# Altium PCB gateway2.PcbDoc
Units mil, origin at the board's own origin, x right, y up, seen from the top; angles counter-clockwise.
Board outline 6000 x 4000 mil, 2 copper layers (Top Layer, Bottom Layer); 21 components, 59 nets, 200 pads, 22 vias.
Unrouted connection lines stored in the file: 8.
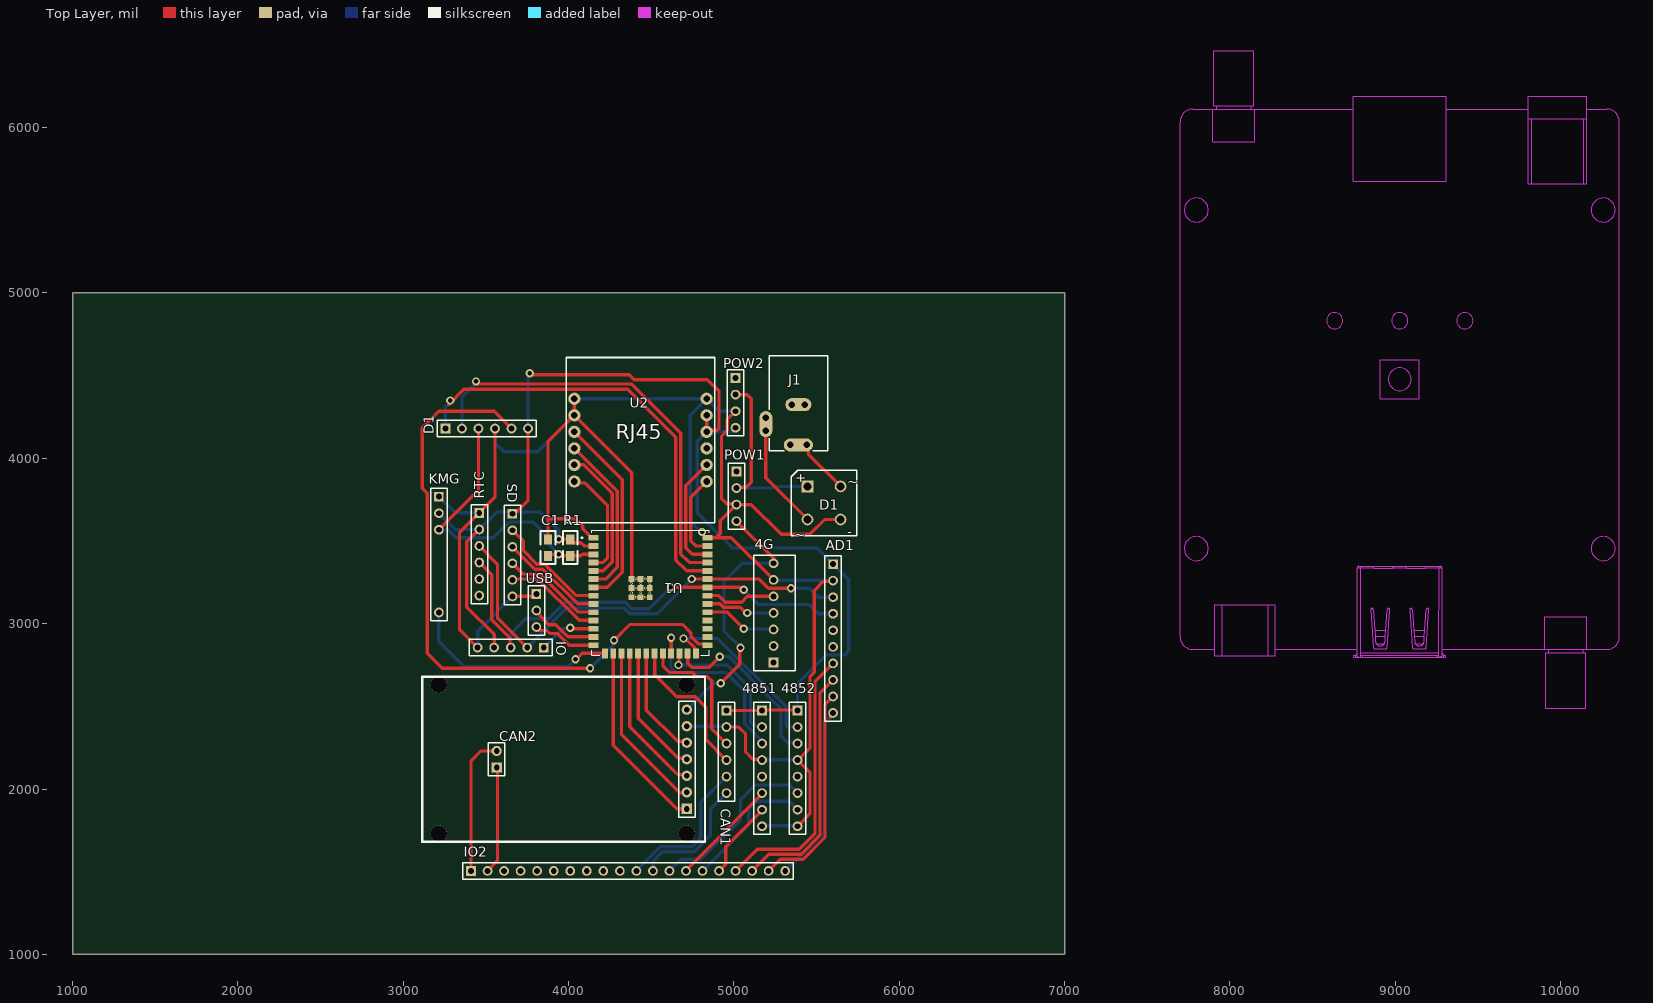
[diagram p0: Top Layer view]
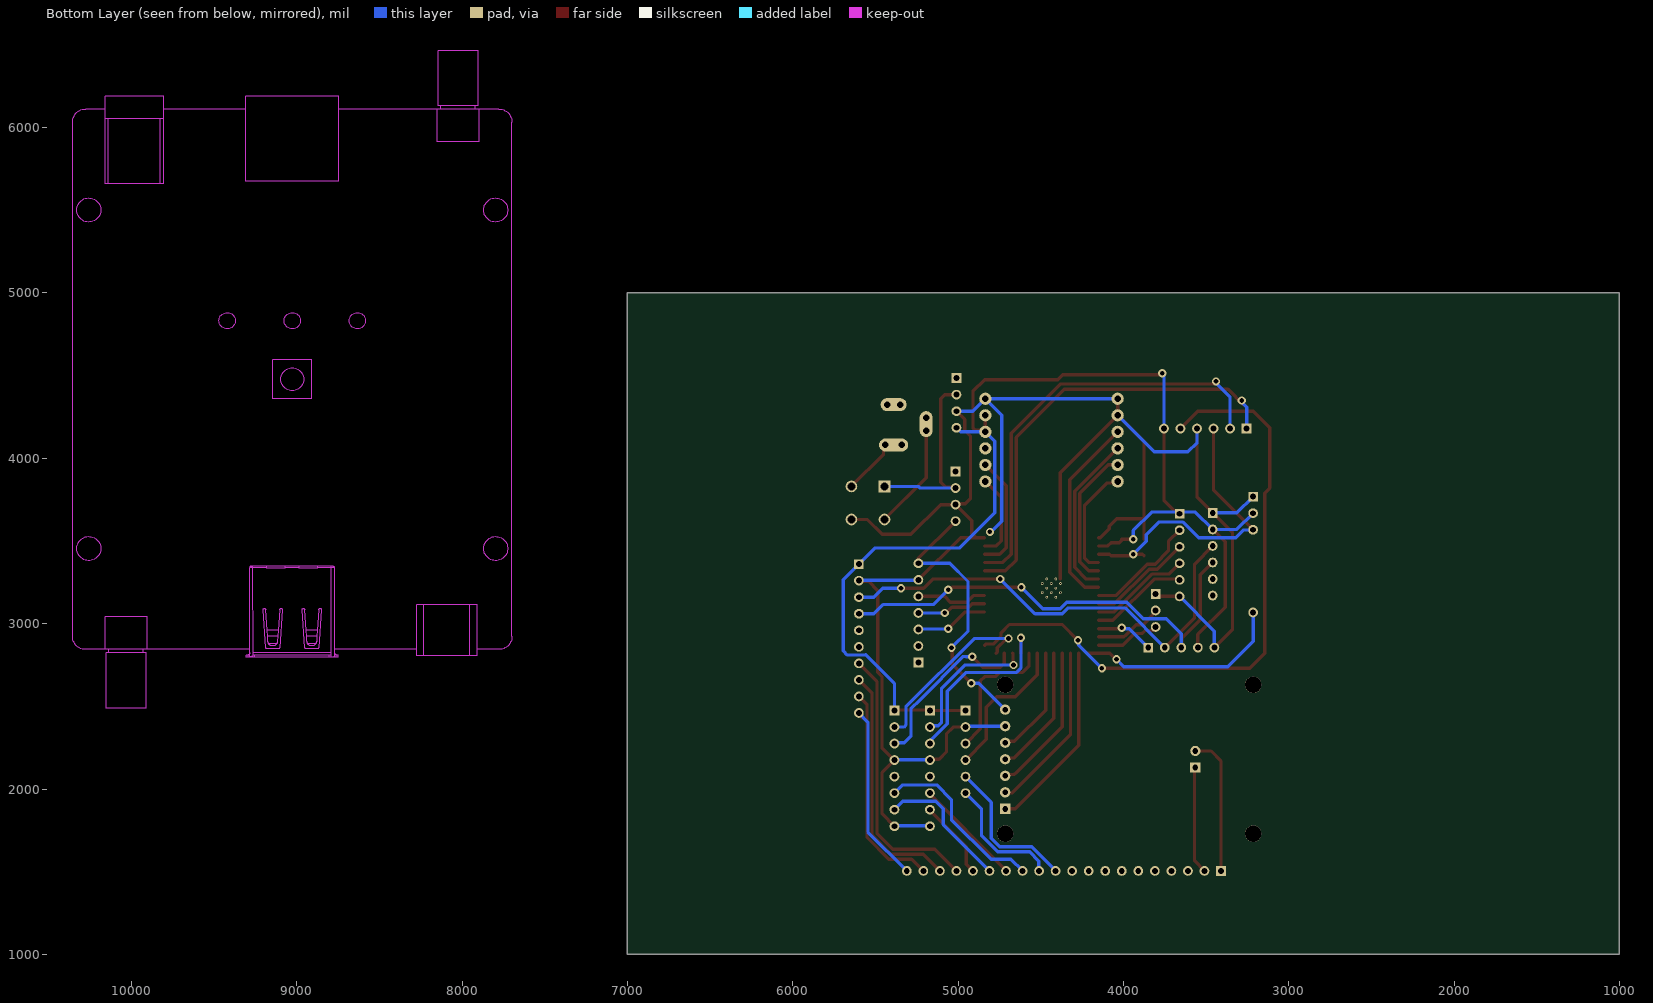
[diagram p1: Bottom Layer view, seen from below]

## Layer stack, top to bottom
Top Solder: solder mask 0.4, Solder Resist, Dk 3.5
Top Layer: signal copper 1.4
Dielectric 1: dielectric 12.6, FR-4, Dk 4.8
Bottom Layer: signal copper 1.4
Bottom Solder: solder mask 0.4, Solder Resist, Dk 3.5

## Board outline
1000,1000 7000,1000 7000,5000 1000,5000

## Design rules (kind name [scope] priority, off if disabled: settings)
Clearance [All] p1: gap=10 ignorepadtopadclearanceinfootprint=FALSE except(0: Arc-Hole Track-Hole SMDPad-Hole THPad-Hole Via-Hole Fill-Hole Poly-Hole Region-Hole Text-Hole)
PolygonConnect [All] p1: connectstyle=Relief reliefconductorwidth=10 reliefentries=4 polygonreliefangle="90 Angle" airgapwidth=10
RoutingVias [All] p1: holewidth=28 width=50 viastyle="Through Hole" minholewidth=28 minwidth=50 maxholewidth=28 maxwidth=50
SolderMaskExpansion [All] p1: expansion=4 istentingtop=FALSE
Width [All] p1: maxlimit=20 minlimit=20 preferedwidth=20
30 further rules are at their usual default settings.

## Components (designator, comment, footprint, x,y, rotation, side; value= is the part's Value field where it differs from the comment)
4G "DS1307模块" DS1307 5240,2765 r90 top
4851 "Header 8" HDR1X8 5170,2475 r270 top
4852 "Header 8" HDR1X8 5385,2475 r270 top
AD1 "Header 10" HDR1X10 5600,3360 r270 top
C1 "100pf" 0805 3875,3510 r90 top value=100pF
CAN1 "2.54DIP6" HDR1X6 4955,2475 r270 top
CAN2 "Can-BUs Module" CAN模块 3955,2260 r270 top
D1 "2.54DIP6" HDR1X6 3255,4180 r0 top
D1 "整流全桥-插" D-38 5545,3730 r0 top
IO "Header 5" HDR1X5 3850,2855 r180 top
IO2 "Header 20" HDR1X20 3410,1505 r0 top
J1 "PWR2.5" KLD-0202 5390,4620 r270 top
KMG "Header 8" KMG 3215,3410 r270 top
POW1 "Header 4" HDR1X4 5015,3920 r270 top
POW2 "Header 4" HDR1X4 5010,4485 r270 top
R1 "10K" 0805 4010,3510 r90 top
RTC "2.54DIP6" HDR1X6 3460,3670 r270 top
SD "Header 6" HDR1X6 3660,3665 r270 top
U1 "ESP32-S3-WROOM-1U" ESP32-S3-WROOM-1U 4435,3213.11 r0 top
U2 "W5500" W5500 2755,3995 r0 top
USB "Header 3" HDR1X3 3805,3180 r270 top

## Footprints (in the part's own frame and the unit in brackets; to place one, negate y for a bottom-side part, rotate by r counter-clockwise, add the part's x,y. Pads: shape width x height; smd on the part's side, far side on the other; paste and mask are expansions set on the pad)
0805 [mil]
  rect 60x50 smd: 1(0,0) 2(-100,0)
  silkscreen extent -150,-45 50,45
CAN模块 [mil]
  rect 62x62 hole 35 paste+0 mask+4: 1(380,760) 8(130,-390)
  round 62 hole 35 paste+0 mask+4: 2(280,760) 3(180,760) 4(80,760) 5(-20,760) 6(-120,760) 7(-220,760) 9(30,-390)
  round 100 hole 100 unplated paste+0: ""(-370,760) ""(-370,-740) ""(530,760) ""(530,-740)
  silkscreen extent -420,-840 580,870
D-38 [mm] "Bridge Rectifier; 4 Terminals; Body 9.4 x 9.4 mm (typ); Pitch 5.08 mm"
  rect 1.8x1.8 hole 1.2: 1(-2.54,2.54)
  round 1.8 hole 1.2: 2(-2.54,-2.54) 3(2.54,-2.54) 4(2.54,2.54)
  silkscreen extent -5,-5 5,5, body extent -5,-5 5,5, height 9.91
DS1307 [mm] "Connector; Header; 7 Position"
  rect 1.5x1.5 hole 0.9: 1(0,0)
  round 1.5 hole 0.9: 2(2.54,0) 3(5.08,0) 4(7.62,0) 5(10.16,0) 6(12.7,0) 7(15.24,0)
  silkscreen extent -1.27,-3.3 16.51,3.05
ESP32-S3-WROOM-1U [mm]
  rect 1.5x0.9 smd: 1(-7.226,7.775) 2(-7.226,6.505) 3(-7.226,5.235) 4(-7.226,3.965) 5(-7.226,2.695) 6(-7.226,1.425) 7(-7.226,0.155) 8(-7.226,-1.115) 9(-7.226,-2.385) 10(-7.226,-3.655) 11(-7.226,-4.925) 12(-7.226,-6.195) 13(-7.226,-7.465) 14(-7.226,-8.735) 27(10.274,-8.735) 28(10.274,-7.465) 29(10.274,-6.195) 30(10.274,-4.925) 31(10.274,-3.655) 32(10.274,-2.385) 33(10.274,-1.115) 34(10.274,0.155) 35(10.274,1.425) 36(10.274,2.695) 37(10.274,3.965) 38(10.274,5.235) 39(10.274,6.505) 40(10.274,7.775)
  rect 0.9x1.5 smd: 15(-5.461,-9.985) 16(-4.191,-9.985) 17(-2.921,-9.985) 18(-1.651,-9.985) 19(-0.381,-9.985) 20(0.889,-9.985) 21(2.159,-9.985) 22(3.429,-9.985) 23(4.699,-9.985) 24(5.969,-9.985) 25(7.239,-9.985) 26(8.509,-9.985)
  rect 0.9x0.9 smd: 41_1(-1.376,1.455) 41_2(0.024,1.455) 41_3(1.424,1.455) 41_4(-1.376,0.055) 41_5(0.024,0.055) 41_6(1.424,0.055) 41_7(-1.376,-1.345) 41_8(0.024,-1.345) 41_9(1.424,-1.345)
  round 0.4 hole 0.2 mask+0: 41_10(-0.676,1.455) 41_11(0.724,1.455) 41_12(-1.376,0.755) 41_13(0.024,0.755) 41_14(1.424,0.755) 41_15(-0.676,0.055) 41_16(0.724,0.055) 41_17(-1.376,-0.645) 41_18(0.024,-0.645) 41_19(1.424,-0.645) 41_20(-0.676,-1.345) 41_21(0.724,-1.345)
  silkscreen extent -9.08,-10.24 10.52,8.96
HDR1X3 [mm] "Connector; Header; 3 Position"
  rect 1.5x1.5 hole 0.9: 1(0,0)
  round 1.5 hole 0.9: 2(2.54,0) 3(5.08,0)
  silkscreen extent -1.27,-1.27 6.35,1.27
HDR1X4 [mm] "Connector; Header; 4 Position"
  rect 1.5x1.5 hole 0.9: 1(0,0)
  round 1.5 hole 0.9: 2(2.54,0) 3(5.08,0) 4(7.62,0)
  silkscreen extent -1.27,-1.27 8.89,1.27
HDR1X5 [mm] "Connector; Header; 5 Position"
  rect 1.5x1.5 hole 0.9: 1(0,0)
  round 1.5 hole 0.9: 2(2.54,0) 3(5.08,0) 4(7.62,0) 5(10.16,0)
  silkscreen extent -1.27,-1.27 11.43,1.27
HDR1X6 [mm] "Connector; Header; 6 Position"
  rect 1.5x1.5 hole 0.9: 1(0,0)
  round 1.5 hole 0.9: 2(2.54,0) 3(5.08,0) 4(7.62,0) 5(10.16,0) 6(12.7,0)
  silkscreen extent -1.27,-1.27 13.97,1.27
HDR1X8 [mm] "Connector; Header; 8 Position"
  rect 1.5x1.5 hole 0.9: 1(0,0)
  round 1.5 hole 0.9: 2(2.54,0) 3(5.08,0) 4(7.62,0) 5(10.16,0) 6(12.7,0) 7(15.24,0) 8(17.78,0)
  silkscreen extent -1.27,-1.27 19.05,1.27
HDR1X10 [mm] "Connector; Header; 10 Position"
  rect 1.5x1.5 hole 0.9: 1(0,0)
  round 1.5 hole 0.9: 2(2.54,0) 3(5.08,0) 4(7.62,0) 5(10.16,0) 6(12.7,0) 7(15.24,0) 8(17.78,0) 9(20.32,0) 10(22.86,0)
  silkscreen extent -1.27,-1.27 24.13,1.27
HDR1X20 [mm] "Connector; Header; 20 Position"
  rect 1.5x1.5 hole 0.9: 1(0,0)
  round 1.5 hole 0.9: 2(2.54,0) 3(5.08,0) 4(7.62,0) 5(10.16,0) 6(12.7,0) 7(15.24,0) 8(17.78,0) 9(20.32,0) 10(22.86,0) 11(25.4,0) 12(27.94,0) 13(30.48,0) 14(33.02,0) 15(35.56,0) 16(38.1,0) 17(40.64,0) 18(43.18,0) 19(45.72,0) 20(48.26,0)
  silkscreen extent -1.27,-1.27 49.53,1.27
KLD-0202 [mm] "DC Power Jack, 2.5mm, KLD Series, PCB Mount"
  oval 2x4.5 all layers, no hole: 1(13.7,0)
  round 1.5 hole 1: 1A(13.7,-1.25) 1B(13.7,1.25) 2A(7.5,-1) 2B(7.5,1) 3A(9.5,-5) 3B(11.5,-5)
  oval 2x4 all layers, no hole: 2(7.5,0)
  oval 4x2 all layers, no hole: 3(10.5,-5)
  silkscreen extent 0,-4.5 14.6,4.5
KMG [mm]
  rect 1.5x1.5 hole 0.9: 1(-9.094,0.011)
  round 1.5 hole 0.9: 2(-6.554,0.011) 3(-4.014,0.011) 8(8.686,0.011)
  silkscreen extent -10.36,-1.26 9.96,1.28
W5500 [mil]
  round 74 hole 40 paste+0 mask+2: 1(1280,365) 2(1280,265) 3(1280,165) 4(1280,65) 5(1280,-35) 6(1280,-135) 7(2080,-135) 8(2080,-35) 9(2080,65) 10(2080,165) 11(2080,265) 12(2080,365)
  silkscreen extent 1230,-385 2130,615

## Part data
4G: library part "Header 7", "Header, 7-Pin", LatestRevisionDate=17-Jul-2002, LatestRevisionNote="Re-released for DXP Platform.", Publisher="Altium Limited"
4851 4852 KMG: "Header, 8-Pin", LatestRevisionDate=17-Jul-2002, LatestRevisionNote="Re-released for DXP Platform.", Publisher="Altium Limited"
AD1: "Header, 10-Pin", LatestRevisionDate=17-Jul-2002, LatestRevisionNote="Re-released for DXP Platform.", Publisher="Altium Limited"
C1: library part "Cap Semi", "Capacitor (Semiconductor SIM Model)", LatestRevisionDate=29-May-2009, LatestRevisionNote="IPC-7351 Footprint Added.", PackageDescription="Chip Capacitor", PackageReference=C1206, Published=8-Jun-2000, Publisher="Altium Limited"
CAN1 D1 RTC: library part "Header 6", "Header, 6-Pin", LatestRevisionDate=17-Jul-2002, LatestRevisionNote="Re-released for DXP Platform.", Publisher="Altium Limited"
D1: library part Bridge1, "Full Wave Diode Bridge", DatasheetVersion=E2732B, LatestRevisionDate=29-May-2009, LatestRevisionNote="Sch pins A & K swapped.", PackageDescription="Bridge Rectifier; 4 Terminals; Body 9.4 x 9.4 mm (typ); Pitch 5.08 mm", PackageReference=D-38, Published=8-Jun-2000, Publisher="Altium Limited"
IO: "Header, 5-Pin", LatestRevisionDate=17-Jul-2002, LatestRevisionNote="Re-released for DXP Platform.", Publisher="Altium Limited"
IO2: "Header, 20-Pin", LatestRevisionDate=17-Jul-2002, LatestRevisionNote="Re-released for DXP Platform.", Publisher="Altium Limited"
J1: "Low Voltage Power Supply Connector", ComponentLink1Description="Manufacturer Link", ComponentLink1URL=http://domino.kycon.com/internet/Products.html, DatasheetDocument=09-May-2002, Published=17-Dec-2003, Publisher="Altium Limited"
POW1 POW2: "Header, 4-Pin", LatestRevisionDate=17-Jul-2002, LatestRevisionNote="Re-released for DXP Platform.", Publisher="Altium Limited"
R1: library part Res3, "Resistor", LatestRevisionDate=29-May-2009, LatestRevisionNote="IPC-7351 Footprint Added.", PackageDescription="Chip Resistor", PackageReference=J1-0603, Published=8-Jun-2000, Publisher="Altium Limited"
SD: "Header, 6-Pin", LatestRevisionDate=17-Jul-2002, LatestRevisionNote="Re-released for DXP Platform.", Publisher="Altium Limited"
U1: "2.4 GHz Wi-Fi (802.11 b/g/n) and Bluetooth 5 (LE) module", Package=Package, Availability="Not in stock", Check_prices=https://www.snapeda.com/parts/ESP32-S3-WROOM-1U/Espressif+Systems/view-part/?ref=eda, MF="Espressif Systems", MP=ESP32-S3-WROOM-1U, Price=None, SnapEDA_Link=https://www.snapeda.com/parts/ESP32-S3-WROOM-1U/Espressif+Systems/view-part/?ref=snap
USB: "Header, 3-Pin", LatestRevisionDate=17-Jul-2002, LatestRevisionNote="Re-released for DXP Platform.", Publisher="Altium Limited"
CAN2: Contributor=RPRCircuits, spicePre=U, spiceSymbolName="Can-BUs Module"

## Via types
v1: diameter 50, hole 28, Top Layer to Bottom Layer, 22 vias

## Nets (pads, with @x,y where several pads share a name; then routed paths per layer and width w, separated by ;. In a path a pad name is that pad's centre, name@x,y a point inside that pad or via, vN(x,y) a via of type N, cw(c..) or ccw(c..) an arc to the next point about the centre after c; other vN are vias at no path point)
4GRST: 4G.3 U1.31 | length 443.5
  Top Layer w20: U1.31@4840,3070 4960,3070 v1(5060,2970)
  Bottom Layer w20: v1(5060,2970) 5062.5,2967.5 5237.5,2967.5 4G.3
4GRXD: 4G.4 U1.32 | length 422.8
  Top Layer w20: U1.32@4840,3120 4914.57,3120 4934.57,3100 5037.22,3100 5072.22,3065 v1(5080,3065)
  Bottom Layer w20: v1(5080,3065) 4G.4
4GTXD: 4G.5 U1.33 | length 431.1
  Top Layer w20: U1.33@4840,3170 4907,3170 4947,3130 5047,3130 5082,3165 4G.5
12V+: D1.4@5645,3830 J1.1 J1.1A J1.1B | length 474.2
  Top Layer w20: J1.1 5423.32,4080.63 5450.45,4053.5 5450.45,4024.55 D1.4@5645,3830
  Bottom Layer w20: J1.1A J1.1 J1.1B
12V-: D1.2@5445,3630 J1.3 J1.3A J1.3B | length 641.6
  Top Layer w20: J1.3B 5193.15,3881.85 D1.2@5445,3630
A0: AD1.7 IO2.17 | length 1648.1
  Top Layer w20: IO2.17 5141.21,1636.21 5395,1636.21 5490.47,1731.69 5490.47,2650.47 AD1.7
A1: AD1.8 IO2.18 | length 1472.9
  Top Layer w20: IO2.18 5211.21,1606.21 5407.43,1606.21 5520.47,1719.26 5520.47,2580.47 AD1.8
A2: AD1.9 IO2.19 | length 1297.8
  Top Layer w20: IO2.19 5281.21,1576.21 5419.85,1576.21 5550.47,1706.83 5550.47,2510.47 AD1.9
A3: AD1.10 IO2.20 | length 1113.3
  Top Layer w20: 5580.47,2429.9 5600,2449.43 AD1.10
  Bottom Layer w20: IO2.20 5545,1740 5545,2405 AD1.10
ADDR: AD1.5
ALART: AD1.6
CAN0-CS: CAN2.5 U1.20 | length 669.9
  Top Layer w20: U1.20@4470.51,2820.79 4470.51,2476.91 4659.39,2288.04 4706.96,2288.04 CAN2.5
CAN0-INT: CAN2.1 U1.16 | length 1160
  Top Layer w20: U1.16@4270.51,2820.79 4270.51,2264.49 4655,1880 CAN2.1
CAN0_MISO: CAN2.4 U1.19 | length 790.6
  Top Layer w20: U1.19@4420.51,2820.79 4420.51,2426.91 4659.39,2188.04 4706.96,2188.04 CAN2.4
CAN0_MOSI: CAN2.3 U1.18 | length 911.3
  Top Layer w20: U1.18@4370.51,2820.79 4370.51,2376.91 4648.74,2098.68 4659.39,2088.04 4706.96,2088.04 CAN2.3
CAN0_SCK: CAN2.2 U1.17 | length 1035.2
  Top Layer w20: U1.17@4320.51,2820.79 4320.51,2326.91 4671.21,1976.21 4711.21,1976.21 CAN2.2
CANH1: CAN1.5 IO2.11 | length 908.6
  Bottom Layer w20: IO2.11 4555,1650 4747.57,1650 4798.79,1701.21 4798.79,1918.79 CAN1.5
CANH2: CAN2.9 IO2.1 | length 851.9
  Top Layer w20: IO2.1 3410,2170 3470,2230 CAN2.9 CAN2.9@3570,2235
CANL1: CAN1.6 IO2.12 | length 767.1
  Bottom Layer w20: IO2.12 4511.95,1506.95 4511.95,1564.53 4567.43,1620 4760,1620 4858,1718 4858,1878 CAN1.6
CANL2: CAN2.8 IO2.2 | length 654.9
  Top Layer w20: IO2.2 3570,1565 CAN2.8@3570,2135
CLK: RTC.6
CRX1: CAN1.4 U1.21 | length 892.5
  Top Layer w20: U1.21@4520.51,2820.79 4520.51,2690.49 4653,2558 4767,2558 4830,2495 4830,2300 CAN1.4
CTX1: CAN1.3 U1.22 | length 825.1
  Top Layer w20: U1.22@4570.51,2820.79 4570.51,2744.49 4610,2705 4748.99,2705 4773.99,2680 4840,2680 4865,2655 4865,2365 CAN1.3
DTR: 4G.1
EN: C1.2 D1.3@3455,4180 KMG.3 R1.2 U1.3 | length 1873.5
  Top Layer w20: KMG.3 3455,3807.61 D1.3@3455,4180 ; C1.2 3885,3420 v1(3940,3420) ; v1@3950,3410 4075,3410 4085,3420 U1.3@4151.02,3420
  Bottom Layer w20: KMG.3 3217.38,3566.08 3274.95,3566.08 3321.51,3519.53 3544.49,3519.53 3639.49,3614.53 3785.47,3614.53 3862.48,3537.52 3862.48,3497.52 v1(3940,3420)
FeedWatchdogPin: KMG.8 U1.15 | length 1277.2
  Top Layer w20: v1(4041.92,2784.64) 4047.4,2784.64 4083.55,2820.79 U1.15@4220.51,2820.79
  Bottom Layer w20: KMG.8 3215.42,2892.58 3368,2740 3997.28,2740 v1(4041.92,2784.64)
GND: 4G.6 4851.4 4851.8 4852.4 4852.8 AD1.2 C1.1 CAN1.2 CAN2.6 D1.3@5645,3630 D1.4@3555,4180 IO.5 KMG.1 POW1.3 POW2.3 RTC.1 SD.6 U1.1 U1.40 U1.41_1 U1.41_2 U1.41_3 U1.41_4 U1.41_5 U1.41_6 U1.41_7 U1.41_8 U1.41_9 U2.1 U2.2 U2.12 USB.1 | length 12473
  Top Layer w20: IO.5 3340,2965 3340,3550 RTC.1 3555,3765 D1.4@3555,4180 ; SD.6 USB.1@3810,3165 ; C1.1 3875,3635 ; U2.1 U2.2 ; U1.1@4151.02,3520 4139.21,3520 4085,3574.21 4085,3590 4040,3635 3875,3635 ; U1.41_1@4381.34,3271.18 4381.34,3913.66 U2.2 ; U1.40@4840,3520 4890,3520 ; CAN1.2 5030,2375 5070,2335 5070,2225 5115,2180 4851.4@5180,2180 ; POW2.3 4960,4235 4960,4170 4925,4135 4925,3755 4955.47,3724.53 5010.47,3724.53 POW1.3 ; 4G.6 4985,3520 4890,3520 ; 4852.8 5460,1850 5460,2100 4852.4 5460.47,2250.47 5460.47,2680.47 5485,2705 5485,3200 5540.47,3255.47 5595.47,3255.47 AD1.2 ; D1.3@5645,3630 5548.12,3630 5458.12,3540 5285,3540 5105,3720 POW1.3 ; 3875,3635 3875,4100 U2.2 ; 4890,3520 4917,3547 4917,3622 POW1.3
  Bottom Layer w20: KMG.1 3313.46,3670 RTC.1 ; IO.5 3450,2955 SD.6 ; D1.4@3555,4180 3555,4095 3610,4040 3815,4040 U2.2 ; U2.1 U2.12 ; CAN2.6@4720,2385 4725,2380 4950,2380 CAN1.2 ; v1@4815,3555 4800,3555 4735,3620 4735,4260 U2.12 ; POW2.3 4910,4285 U2.12 ; 4851.4@5180,2180 5182.5,2177.5 5382.5,2177.5 4852.4 ; 4851.8@5182.5,1782.5 5180,1780 5182.5,1777.5 5382.5,1777.5 4852.8 ; 4G.6 5242.5,3262.5 5597.5,3262.5 AD1.2
  other v1: 4807.5,3555
I2C_SCL: AD1.3 IO.2 RTC.3 U1.35 | length 2831.6
  Top Layer w20: RTC.3 3570,3360 3570,3035 IO.2 ; v1(4745,3270) 4840,3270 5154,3270 5209,3215 v1(5345,3215)
  Bottom Layer w20: IO.2 3990.04,3095 4335,3095 4370,3060 4535,3060 v1(4745,3270) ; v1(5345,3215) 5455,3215 5510,3160 AD1.3
I2C_SDA: AD1.4 IO.3 RTC.4 U1.34 | length 2844.1
  Top Layer w20: RTC.4 3535,3295 3535,3025 3645.47,2914.53 3645.47,2869.53 3650,2865 IO.3 ; v1(4617,3220) 5036.88,3220 5051.88,3205 v1(5060,3205)
  Bottom Layer w20: IO.3 3650,2940 3740.47,3030.47 3880.45,3030.47 3979.98,3130 4342.43,3130 4382.43,3090 4487,3090 v1(4617,3220) ; v1(5060,3205) 5149.53,3115.47 5454.53,3115.47 5510,3060 AD1.4
INT: RTC.5
IO0: D1.5 U1.27 | length 3922
  Top Layer w20: D1.5 3550,4285 3215,4285 3115,4185 3115,3820 3145,3790 3145,2820 3235,2730 v1(4130,2730) ; v1(4275,2900) 4370,2995 4689.47,2995 4740,2944.47 4740,2925 4788.07,2876.93 4831.77,2876.93 U1.27
  Bottom Layer w20: v1(4130,2730) 4269.26,2869.26 4269.26,2894.26 v1(4275,2900)
NET: 4G.2
NetJ1_2: J1.2 J1.2A J1.2B | length 78.7
  Bottom Layer w20: J1.2A J1.2 J1.2B
PCF8575INT: IO.1 U1.12 | length 352.8
  Top Layer w20: v1(4010,2975) 4015,2970 U1.12@4151.02,2970
  Bottom Layer w20: IO.1 3964.26,2969.26 4004.26,2969.26 v1(4010,2975)
POWERIN: D1.1@5445,3830 POW1.2 POW2.2 | length 1149
  Top Layer w20: POW2.2 5080,4385 5105,4360 5105,3855 5074.53,3824.53 5019.53,3824.53 POW1.2
  Bottom Layer w20: POW1.2 5230,3820 5240,3830 D1.1@5445,3830
RS485A1: 4851.6 IO2.14 | length 669.7
  Top Layer w20: IO2.14 4952,1747 4952,1752 4851.6@5180,1980
RS485A2: 4852.6 IO2.13 | length 1081
  Bottom Layer w20: IO2.13 4680,1575 4800,1575 5040,1815 5040,1935 5129.53,2024.53 5335.47,2024.53 4852.6
RS485B1: 4851.7 IO2.16 | length 486.8
  Top Layer w20: IO2.16 4950,1545 4950,1650 4851.7@5180,1880
RS485B2: 4852.7 IO2.15 | length 825.7
  Bottom Layer w20: IO2.15 5090,1785 5090,1880 5135.47,1925.47 5334.53,1925.47 4852.7
RX1: 4851.3 U1.23 | length 1139.8
  Top Layer w20: v1(4620,2915) 4620.26,2914.74 4620.26,2821.04 U1.23@4620.51,2820.79
  Bottom Layer w20: v1(4620,2915) 4620,2731.36 4646.36,2705 4950.86,2705 5065,2590.86 5065,2395 4851.3@5180,2280
RX2: 4852.3 U1.25 | length 1083.5
  Top Layer w20: U1.25@4720.51,2820.79 4720.51,2759.49 4745,2735 4850,2735 v1(4915,2800)
  Bottom Layer w20: v1@4910,2800 v1(4915,2800) 4950,2800 4951.72,2801.72 4968.28,2801.72 5229.53,2540.47 5229.67,2540.47 5285,2485.15 5285,2320 5325.47,2279.53 5380.47,2279.53 4852.3
RXD0: D1.1@3255,4180 U1.36 | length 2656.9
  Top Layer w20: 3275,4325 3367,4417 4358,4417 4649,4126 4649,3385 4714,3320 U1.36@4840,3320
  Bottom Layer w20: D1.1@3255,4180 3255,4310 v1@3280,4335
  other v1: 3285,4350
SD_CLK: SD.4 U1.10 | length 613.2
  Top Layer w20: SD.4 3725,3300 3827.43,3300 4057.43,3070 U1.10@4151.02,3070
SD_CS: SD.2 U1.8 | length 688.4
  Top Layer w20: SD.2 3727.5,3497.5 3727.5,3439.93 3807.43,3360 3857.28,3360 4047.28,3170 U1.8@4151.02,3170
SD_MISO: SD.5 U1.11 | length 596.6
  Top Layer w20: SD.5 3665,3270 3815,3270 4065,3020 U1.11@4151.02,3020
SD_MOSI: SD.3 U1.9 | length 633.9
  Top Layer w20: SD.3 3795,3330 3844.85,3330 4054.85,3120 U1.9@4151.02,3120
TX1: 4851.2 U1.24 | length 858.3
  Top Layer w20: v1(4665,2750) 4667.76,2752.76 4667.76,2818.03 U1.24@4670.51,2820.79
  Bottom Layer w20: v1(4665,2750) 4960,2750 5100,2610 5100,2402.9 5120.43,2382.47 5162.53,2382.47 4851.2 ; 4851.2@5177.5,2382.5 4851.2@5180,2380
TX2: 4852.2 U1.26 | length 1104
  Top Layer w20: v1(4695,2910) 4700.74,2904.26 4712.57,2904.26 4762.8,2854.03 4762.8,2828.5 U1.26@4770.51,2820.79
  Bottom Layer w20: v1(4695,2910) 4902.57,2910 5315,2497.57 5315,2386.72 5326.72,2375 4852.2
TXD0: D1.2@3355,4180 U1.37 | length 2580.8
  Top Layer w20: v1@3445,4450 4380,4450 4679,4151 4679,3420 4729,3370 U1.37@4840,3370
  Bottom Layer w20: D1.2@3355,4180 3355,4370 v1@3440,4455
  other v1: 3440,4465
USB_D+: U1.13 USB.2 | length 401.1
  Top Layer w20: USB.2@3810,3065 3880.65,2994.35 3923.07,2994.35 3986.24,2931.18 3997.43,2920 U1.13@4151.02,2920
USB_D-: U1.14 USB.3 | length 380.4
  Top Layer w20: USB.3@3810,2965 3816.67,2958.33 3869.53,2958.33 3887.86,2940 3935,2940 4005,2870 U1.14@4151.02,2870
VCC50: 4G.7 CAN2.7 POW1.4 | length 1664.1
  Top Layer w20: v1(4920,2640) 5035,2755 5035,2850 v1(5040,2855) ; POW1.4 5240,3395 4G.7
  Bottom Layer w20: CAN2.7@4720,2485 4875,2640 v1(4920,2640) ; v1(5040,2855) 4940,2955 4940,3255 5050,3365 4G.7
VDD33: 4851.1 4852.1 AD1.1 CAN1.1 D1.6 IO.4 KMG.2 POW2.4 R1.1 RTC.2 SD.1 U1.2 U2.10 U2.11 | length 7609.1
  Top Layer w20: RTC.2 3385,3495 3385,3100 3550,2935 IO.4 ; SD.1@3685,3675 3755,3745 D1.6 ; v1@3760,4505 4367.43,4505 4397.43,4475 4840,4475 4910,4405 4910,4185 4895.33,4170.33 4845.33,4170.33 U2.10 U2.11 ; v1(3941,3510) R1.1 4010,3505 4025,3490 4075,3490 4095,3470 U1.2@4151.02,3470 ; CAN1.1 4851.1 ; 4851.1@5182.5,2477.5 5382.5,2477.5 4852.1
  Bottom Layer w20: KMG.2 3313.46,3570 RTC.2 ; RTC.2@3467.47,3562.53 RTC.2 ; D1.6 3755,4500 v1@3760,4505 ; v1(3941,3510) 3941,3564 3830,3675 3565,3675 RTC.2 ; POW2.4 4985,4160 U2.10 4778,4103 4778,3670 4990,3458 5502,3458 AD1.1 5695,3265 5695,2836.72 5668.76,2810.47 5559.53,2810.47 5558.28,2811.72 5385,2638.43 4852.1
  other v1: 3765,4515
W_CLK: U1.6 U2.4 | length 1000.7
  Top Layer w20: U2.4 4295,3800 4295,3340 4225,3270 U1.6@4151.02,3270
W_CS: U1.5 U2.5 | length 852.1
  Top Layer w20: U2.5 4036.29,3961.29 4091.29,3961.29 4265,3787.57 4265,3374.45 4210.55,3320 U1.5@4151.02,3320
W_INT: U1.4 U2.6 | length 676.2
  Top Layer w20: U2.6 4044.43,3850.57 4102,3850.57 4235,3717.57 4235,3394.45 4210.55,3370 U1.4@4151.02,3370
W_MISO: U1.39 U2.7 | length 513.2
  Top Layer w20: U2.7 4739,3764 4739,3500 4769,3470 U1.39@4840,3470
W_MOSI: U1.7 U2.3 | length 1181.4
  Top Layer w20: U2.3 4325,3870 4325,3310 4235,3220 U1.7@4151.02,3220
W_RST: U1.38 U2.8 | length 699.8
  Top Layer w20: U2.8 4709,3834 4709,3460 4749,3420 U1.38@4840,3420
pads on no net: 4851.5 4852.5 CAN2. IO2.3 IO2.4 IO2.5 IO2.6 IO2.7 IO2.8 IO2.9 IO2.10 POW1.1 POW2.1 U1.28 U1.29 U1.30 U1.41_10 U1.41_11 U1.41_12 U1.41_13 U1.41_14 U1.41_15 U1.41_16 U1.41_17 U1.41_18 U1.41_19 U1.41_20 U1.41_21 U2.9

## Keep-outs
Keep-Out Layer:
  drawing of 7621 lines, arcs and shapes, not listed

## Silkscreen, mask and mechanical layers (free items; w line width, h text height)
Mechanical 2:
  circle w0.5: c5662.11,4016.69 r72.83
  circle w0.5: c3201.48,4016.69 r72.83
  circle w0.5: c3201.48,1969.44 r72.83
  circle w0.5: c5662.11,1969.44 r72.83
  lines w0.5: 3305,1359.21 4174.93,1359.21 ; 3313.68,1359.21 3181.8,1359.21 cw(c3181.8,1437.95) 3103.06,1437.95 3103.06,4548.18 cw(c3181.8,4548.18) 3181.8,4626.92 3299.91,4626.92 3555.81,4626.92 4150.3,4626.92 ; 4150.3,4625 4713.29,4625 ; 4175,1359.21 5307.78,1359.21 5563.69,1359.21 5681.8,1359.21 ccw(c5681.8,1437.95) 5760.54,1437.95 5760.54,4548.18 ccw(c5681.8,4548.18) 5681.8,4626.92 5563.69,4626.92 ; 4491.47,1598.79 cw(c4499.33,1599.36) 4507.18,1599.93 4516.23,1475.17 ; 4713.29,4626.92 5209.36,4626.92 ; 5215,4625 5569.33,4625

## Text inside footprints (layer, text, board x,y; h text height)
D1: Top Overlay "+" at 5371.38,3854.57 h59.06; Top Overlay "-" at 5685,3530 h59.05; Top Overlay "~" at 5365,3510 h59.05; Top Overlay "~" at 5685,3830 h59.05
U2: Top Overlay "RJ45" at 4285,4115 h90